# Altium PCB Analog_Board_pcb.PcbDoc
Units mil, origin at the board's own origin, x right, y up, seen from the top; angles counter-clockwise.
Board outline 1900 x 1960 mil, 2 copper layers (Top, Bottom), stack 61.811 mil thick; 37 components, 34 nets, 146 pads, 30 vias.
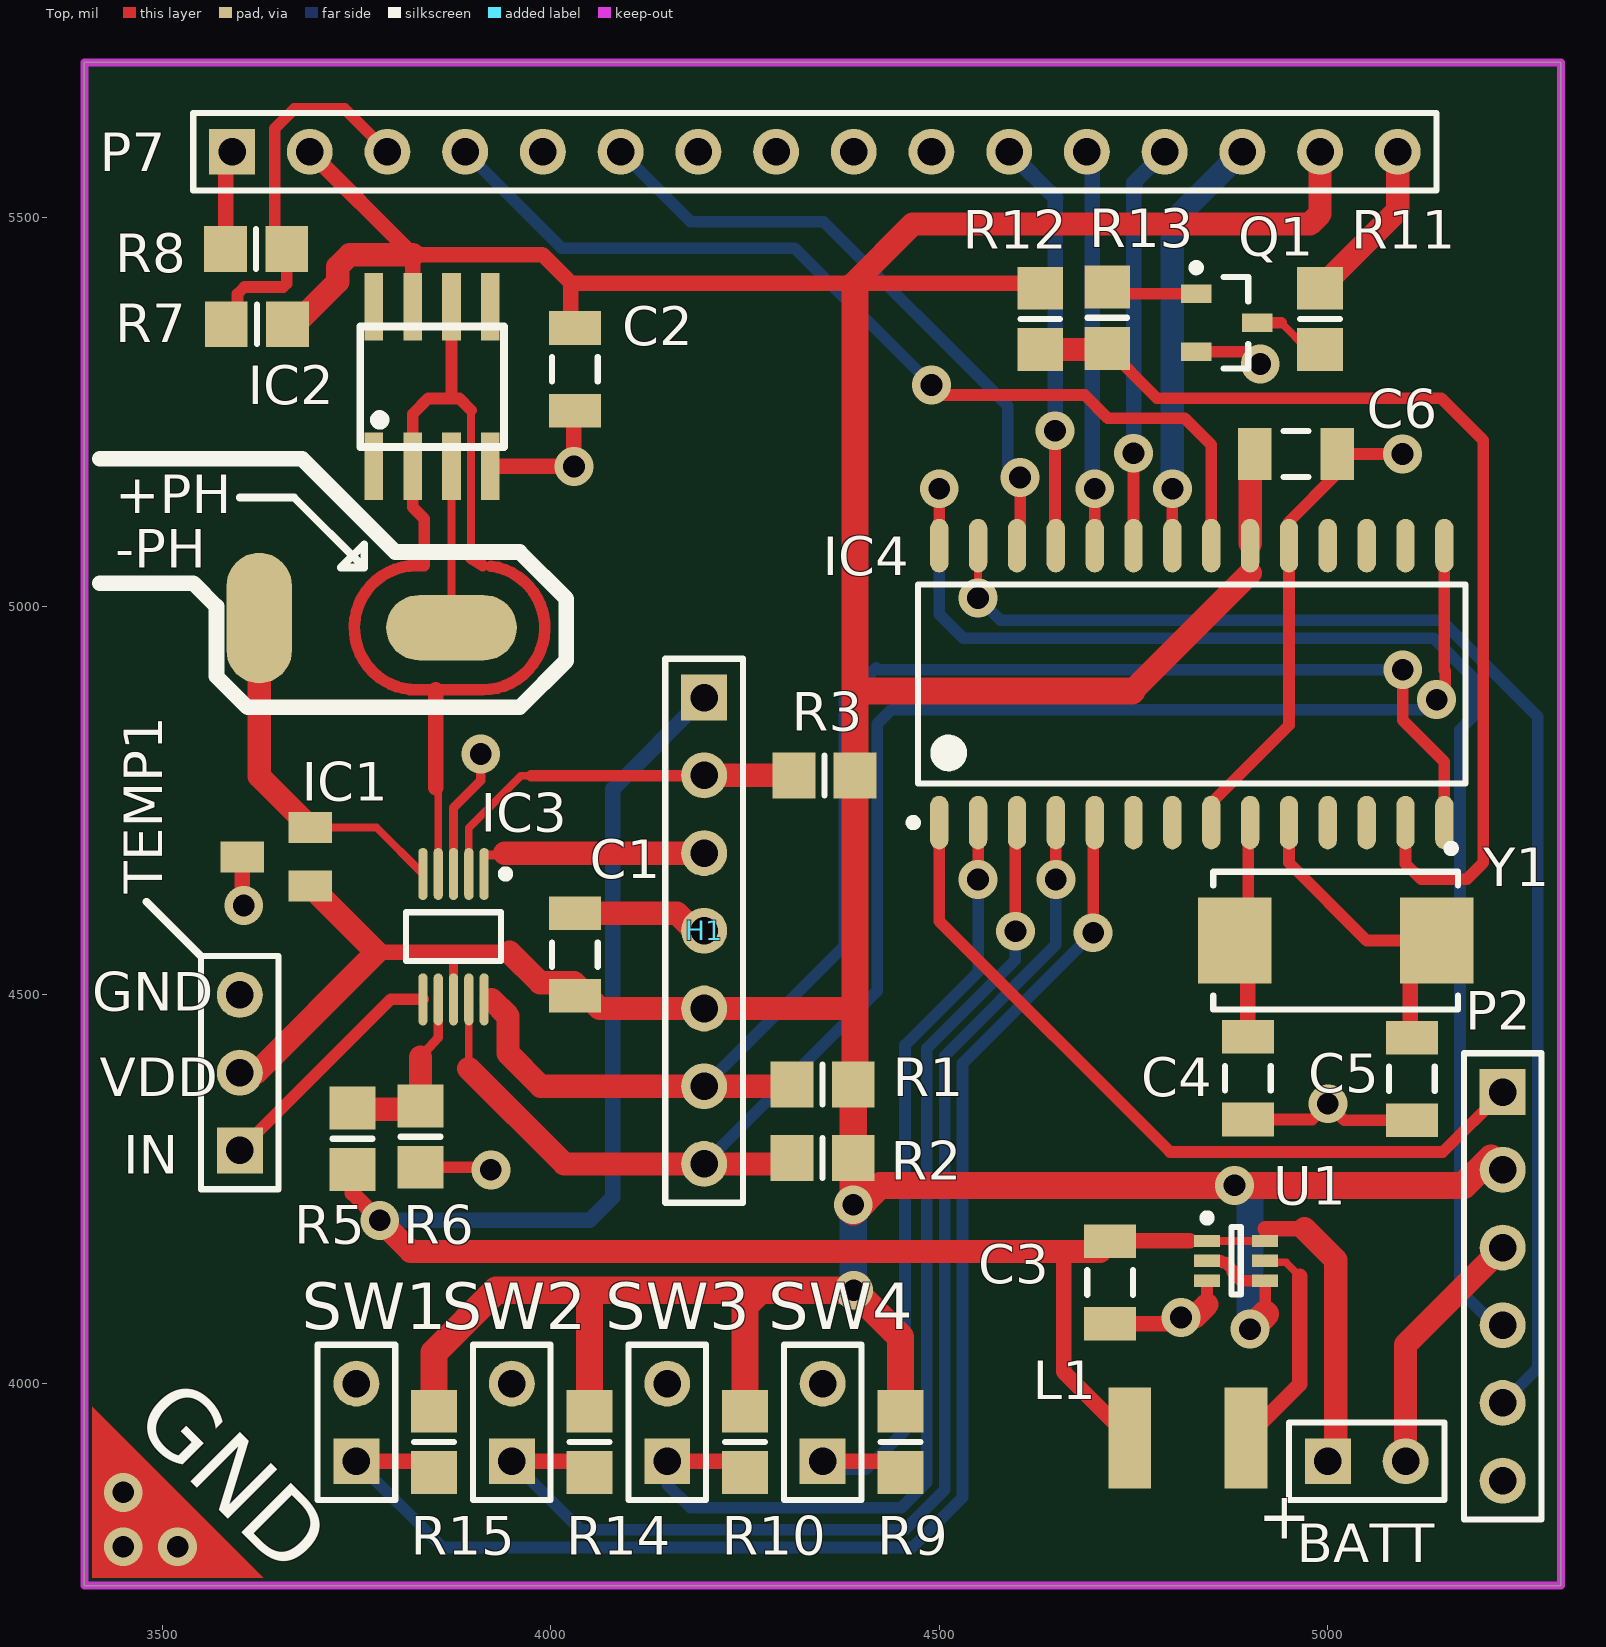
[diagram p0: Top view]
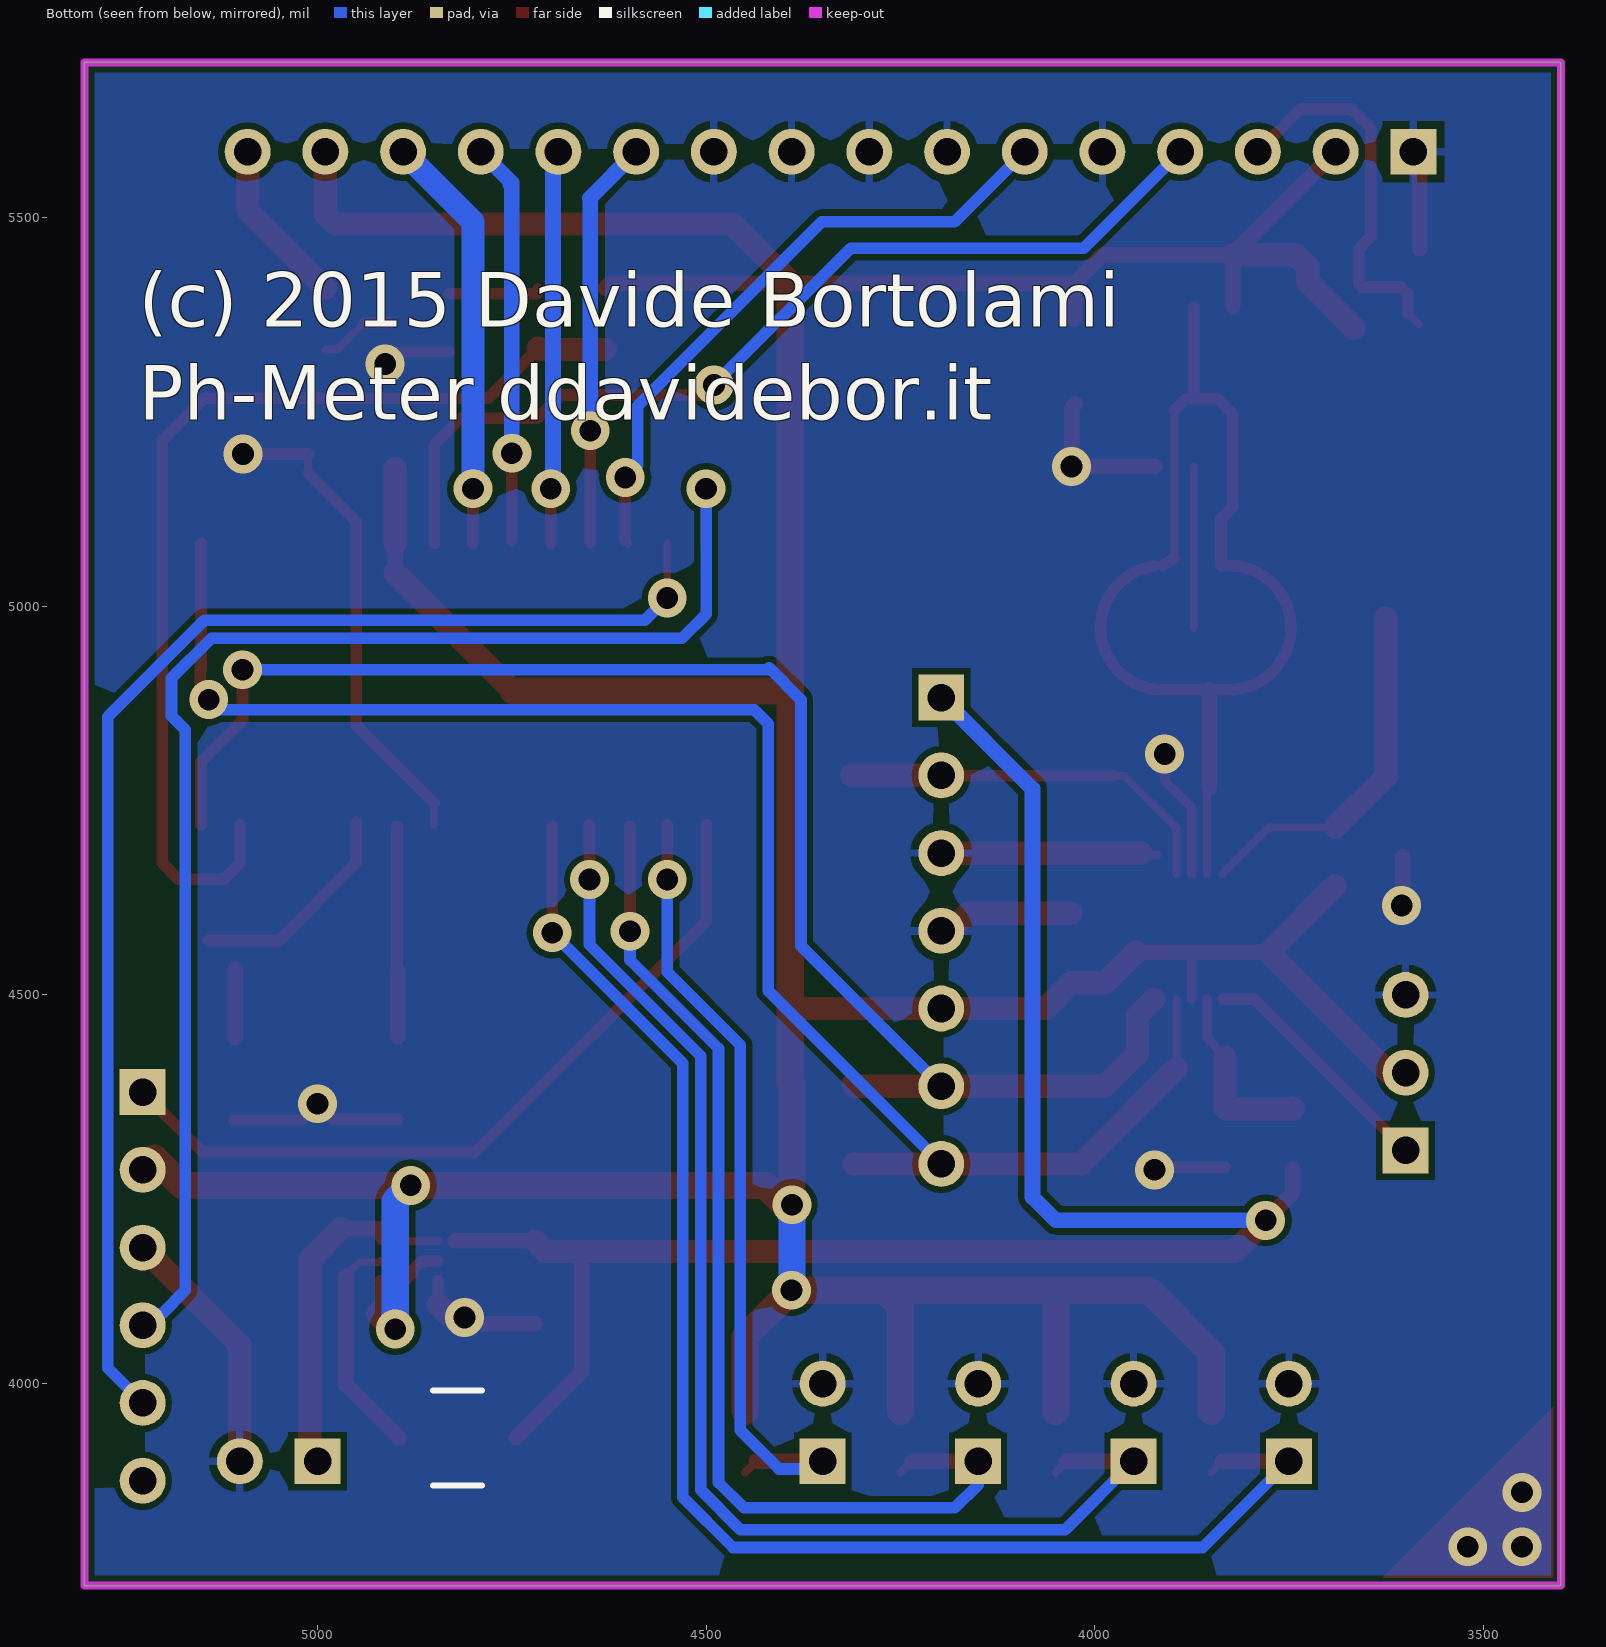
[diagram p1: Bottom view, seen from below]

## Layer stack, top to bottom
Top Solder: solder mask 0.4, Solder Resist, Dk 3.5
Top: signal copper 1.378
Dielectric 1: core 59.0551, FR-4, Dk 4.8
Bottom: signal copper 1.378
Bottom Solder: solder mask 0.4, Solder Resist, Dk 3.5

## Board outline
3400,3740 3400,5700 5300,5700 5300,3740

## Design rules (kind name [scope] priority, off if disabled: settings)
Clearance mdViaVia [IsVia vs IsVia] p1: gap=8
Clearance mdPadVia [IsPad vs IsVia] p2: gap=8
Clearance mdPadPad [IsPad vs IsPad] p3: gap=8
Clearance mdWireVia [(InLayerClass('Signal Layers') AND IsTrack) vs IsVia] p4: gap=8
Clearance mdWirePad [(InLayerClass('Signal Layers') AND IsTrack) vs IsPad] p5: gap=8
Clearance mdWireWire [(InLayerClass('Signal Layers') AND IsTrack) vs (InLayerClass('Signal Layers') AND IsTrack)] p6: gap=8
Clearance [All] p7: gap=8
HoleSize [All] p1: absolutevalues=TRUE maxlimit=100000 minlimit=12 maxpercent=80.000 minpercent=20.000
HoleToHoleClearance [All] p1: gap=8 allowstackedmicrovias=TRUE
PolygonConnect ThermalVias [IsVia] p1: connectstyle=Direct reliefconductorwidth=10 reliefentries=4 polygonreliefangle="90 Angle" airgapwidth=10
PolygonConnect [All] p2: connectstyle=Relief reliefconductorwidth=10 reliefentries=4 polygonreliefangle="90 Angle" airgapwidth=10
RoutingVias [All] p1: holewidth=28 width=50 viastyle="Through Hole" minholewidth=28 minwidth=50 maxholewidth=28 maxwidth=50
SilkToSilkClearance [All] p1 off: silktosilkclearance=8
SilkToSolderMaskClearance [IsPad] p1 off: minsilkscreentomaskgap=10 clearancetoexposedcopper=TRUE
SolderMaskExpansion [All] p1: expansion=3
Width [All] p1: maxlimit=100000 minlimit=6 preferedwidth=10 minimp=50.000000 maximp=50.000000 favimp=50.000000
26 further rules are at their usual default settings.

## Components (designator, comment, footprint, x,y, rotation, side; value= is the part's Value field where it differs from the comment)
BATT "Header 2" HDR1X2 5000,3900 r0 top (schematic designator P1)
C1 "" C1206 4031,4552 r270 top
C2 "" C1206 4031,5305 r90 top
C3 "" C1206 4720,4130 r90 top
C4 "" C1206 4897,4393 r270 top
C5 "" C1206 5108,4392 r270 top
C6 "Cap Semi" C1206 4959,5196 r180 top
H1 "Header 7" HDR1X7 4197.4,4882.6 r270 top
IC1 "MAX6101" SOT23 3647.4,4677.6 r90 top
IC2 "LMC6061" SO08 3847.4,5282.6 r0 top
IC3 "ADS1015IDGSR" TI-DGS10_N 3875,4575 r270 top
IC4 "PIC16F876-04/SO" MCHP-SOIC-SO28_L 4825,4900 r90 top
L1 "Inductor" INDC4532 4820,3930 r180 top
P2 "Header 6" HDR1X6 5225,4375 r270 top
P7 "Header 16" HDR1X16 3590,5585 r0 top
Q1 "BC846" SOT23_L 4870,5365 r0 top
R1 "10K" 6-0805_M 4350,4385 r180 top
R2 "10K" 6-0805_M 4350,4290 r180 top
R3 "10K" 6-0805_M 4352.4,4782.6 r180 top
R5 "10K" 6-0805_M 3745,4315 r90 top
R6 "1K" 6-0805_M 3832.4,4317.6 r270 top
R7 "Res3" 6-0805_M 3622,5363 r0 top
R8 "Res3" 6-0805_M 3621,5460 r0 top
R9 "Res3" 6-0805_M 4450,3925 r90 top
R10 "Res3" 6-0805_M 4250,3925 r90 top
R11 "Res3" 6-0805_M 4990,5370 r90 top
R12 "Res3" 6-0805_M 4630,5370 r90 top
R13 "Res3" 6-0805_M 4716.18,5371.42 r270 top
R14 "Res3" 6-0805_M 4050,3925 r90 top
R15 "Res3" 6-0805_M 3850,3925 r90 top
SW1 "Header 2" HDR1X2 3750,3900 r90 top (schematic designator P6)
SW2 "Header 2" HDR1X2 3950,3900 r90 top (schematic designator P5)
SW3 "Header 2" HDR1X2 4150,3900 r90 top (schematic designator P4)
SW4 "Header 2" HDR1X2 4350,3900 r90 top (schematic designator P3)
TEMP1 "Header 3" HDR1X3 3600,4300 r90 top
U1 "TPS61222DCKR" DCK6_N 4882,4158 r0 top
Y1 "16Mhz" CFPX-93 5010,4570 r180 top

## Footprints (in the part's own frame and the unit in brackets; to place one, negate y for a bottom-side part, rotate by r counter-clockwise, add the part's x,y. Pads: shape width x height; smd on the part's side, far side on the other; paste and mask are expansions set on the pad)
6-0805_M [mm] "Chip Resistor, Body 2.0x1.2mm, IPC Low Density"
  rect 1.4x1.5 smd: 1(-1,0) 2(1,0)
  silkscreen extent 0,-0.65 0,0.65, body extent -1.07,-0.7 1.07,0.7, height 0.7
C1206 [mm] "Chip Capacitor, Body 3.2x1.6mm, IPC High Density"
  rect 1.1x1.7 smd: 1(-1.35,0) 2(1.35,0)
  silkscreen extent -0.4,-0.75 0.4,0.75, body extent -1.7,-0.9 1.7,0.9, height 1.3
CFPX-93 [mm] "Surface Mount Quartz Crystal; Body 8.2 x 4.7 mm (LxW max)"
  rect 2.4x2.8 smd: 1(-3.3,0) 2(3.3,0)
  silkscreen extent -4,-3.14 4,2.25
DCK6_N [mm] "SOT23, 6-Leads, Body 2x1.3mm, Pitch 0.65mm, Lead Span 2.1mm, IPC Medium Density"
  rect 0.85x0.4 smd: 1(-0.95,0.65) 2(-0.95,0) 3(-0.95,-0.65) 4(0.95,-0.65) 5(0.95,0) 6(0.95,0.65)
  silkscreen extent -1.07,-1.1 0.15,1.52, body extent -0.7,-1.07 0.7,1.08, height 1.1
HDR1X2 [mm] "Connector; Header; 2 Position"
  rect 1.5x1.5 hole 0.9: 1(0,0)
  round 1.5 hole 0.9: 2(2.54,0)
  silkscreen extent -1.27,-1.27 3.81,1.27
HDR1X3 [mm] "Connector; Header; 3 Position"
  rect 1.5x1.5 hole 0.9: 1(0,0)
  round 1.5 hole 0.9: 2(2.54,0) 3(5.08,0)
  silkscreen extent -1.27,-1.27 6.35,1.27
HDR1X6 [mm] "Connector; Header; 6 Position"
  rect 1.5x1.5 hole 0.9: 1(0,0)
  round 1.5 hole 0.9: 2(2.54,0) 3(5.08,0) 4(7.62,0) 5(10.16,0) 6(12.7,0)
  silkscreen extent -1.27,-1.27 13.97,1.27
HDR1X7 [mm] "Connector; Header; 7 Position"
  rect 1.5x1.5 hole 0.9: 1(0,0)
  round 1.5 hole 0.9: 2(2.54,0) 3(5.08,0) 4(7.62,0) 5(10.16,0) 6(12.7,0) 7(15.24,0)
  silkscreen extent -1.27,-1.27 16.51,1.27
HDR1X16 [mm] "Connector; Header; 16 Position"
  rect 1.5x1.5 hole 0.9: 1(0,0)
  round 1.5 hole 0.9: 2(2.54,0) 3(5.08,0) 4(7.62,0) 5(10.16,0) 6(12.7,0) 7(15.24,0) 8(17.78,0) 9(20.32,0) 10(22.86,0) 11(25.4,0) 12(27.94,0) 13(30.48,0) 14(33.02,0) 15(35.56,0) 16(38.1,0)
  silkscreen extent -1.27,-1.27 39.37,1.27
INDC4532 [mm] "Chip Inductor, Body 4.5x3.2mm, IPC High Density"
  rect 1.4x3.3 smd: 1(1.9,0) 2(-1.9,0)
  body extent -2.4,-1.7 2.4,1.7, height 0.55
MCHP-SOIC-SO28_L [mm] "SOIC, 28-Leads, Body 17.9x7.5mm, Pitch 1.27mm, IPC High Density"
  oval 1.75x0.6 smd: 1(-4.525,8.255) 2(-4.525,6.985) 3(-4.525,5.715) 4(-4.525,4.445) 5(-4.525,3.175) 6(-4.525,1.905) 7(-4.525,0.635) 8(-4.525,-0.635) 9(-4.525,-1.905) 10(-4.525,-3.175) 11(-4.525,-4.445) 12(-4.525,-5.715) 13(-4.525,-6.985) 14(-4.525,-8.255) 15(4.525,-8.255) 16(4.525,-6.985) 17(4.525,-5.715) 18(4.525,-4.445) 19(4.525,-3.175) 20(4.525,-1.905) 21(4.525,-0.635) 22(4.525,0.635) 23(4.525,1.905) 24(4.525,3.175) 25(4.525,4.445) 26(4.525,5.715) 27(4.525,6.985) 28(4.525,8.255)
  silkscreen extent -4.65,-8.95 3.25,9.23, body extent -3.75,-8.95 3.75,8.95, height 2.65
SO08 [mil] "SO08"
  rect 24x87 smd: 1(-75,-102.36) 2(-25,-102.36) 3(25,-102.36) 4(75,-102.36) 5(75,103) 6(25,103) 7(-25,103) 8(-75,103)
SOT23 [mil] "SOT23"
  rect 40x56 smd: 1(-37.4,-43.31) 2(38,-43.31) 3(0,44)
SOT23_L [mm] "SOT23, 3-Leads, Body 2.9x1.3mm, Pitch 0.95mm, Lead Span 2.3mm, IPC High Density"
  rect 1x0.6 smd: 1(-1,0.95) 2(-1,-0.95) 3(1,0)
  silkscreen extent -1.12,-1.5 0.7,1.92, body extent -0.7,-1.5 0.7,1.5, height 1.1
TI-DGS10_N [mm] "SOP, 10-Leads, Body 3x3mm, Pitch 0.5mm, IPC Medium Density"
  oval 1.7x0.3 smd: 1(-2.05,1) 2(-2.05,0.5) 3(-2.05,0) 4(-2.05,-0.5) 5(-2.05,-1) 6(2.05,-1) 7(2.05,-0.5) 8(2.05,0) 9(2.05,0.5) 10(2.05,1)
  silkscreen extent -2.17,-1.55 0.8,1.83, body extent -1.55,-1.55 1.55,1.55, height 1.1

## Part data
BATT SW1 SW2 SW3 SW4: "Header, 2-Pin"
C1 C2 C3 C4 C5: library part "Cap Semi", "Capacitor (Semiconductor SIM Model)"
C6: "Capacitor (Semiconductor SIM Model)"
H1: "Header, 7-Pin"
IC1: library part MAX6520, "<b> 1.2V Voltage Reference</b> 50ppm/°C, SOT23, 3-Terminal<p> / Source: <a href=\"http://datasheets.maxim-ic.com/en/ds/MAX6520.pdf\"> Data sheet </a>"
IC2: library part 1AMP_P7+4D, "<b>OP AMP</b>"
IC3: "12-Bit ADC with Integrated Multiplexer, PGA, Comparator, Oscillator, and Reference, -40 to 125 degC, 10-pin SOP (DGS10), Green (RoHS & no Sb/Br)"
IC4: "8-Bit CMOS Flash Microcontroller, 4 MHz, 22 I/O, 0 to 70 degC, 28-pin SOIC (SO28), Tube"
P2: "Header, 6-Pin"
P7: "Header, 16-Pin"
Q1: "NPN General-purpose Transistor"
R1 R2 R3 R5 R6: library part RESISTOR0805, "<p><b>Resistors</b></p> / <b>0402</b> - 0402 Surface Mount Package / <ul> / <li>22 Ohm 1% 1/16W [Digikey: 311-22.0LRTR-ND]</li> / <li>33 Ohm 5% 1/16W</li> / <li>1.0K 5% 1/16W</li> / <li>1.5K 5% 1/16W</li> / <li>2.0K 1% 1/16W</li> / <li>10.0K 1% 1/16W [Digikey: 311-10.0KLRTR-ND]</li> / <li>10.0K 5% 1/16W [Digikey: RMCF0402JT10K0TR-ND]</li> / <li>12.1K 1% 1/16W [Digikey: 311-22.0LRTR-ND]</li> / <li>100.0K 5% 1/16W</li> / </ul> / <b>0603</b> - 0603 Surface Mount Package<br> / <ul> / <li>0 Ohm 1/10 Watt 1% Resistor</li> / <li>15 Ohm 1/10 Watt 1% Resistor</li> / <li>33 Ohm 1/10 Watt 1% Resistor</li> / <li>49.9 Ohm 1/10 Watt 1% Resistor</li> / <li>100 Ohm 1/10 Watt 1% Resistor</li> / <li>150 Ohm 1/10 Watt 1% Resistor</li> / <li>240 Ohm 1/10 Watt 1% Resistor</li> / <li>390 Ohm 1/10 Watt 1% Resistor</li> / <li>560 Ohm 1/10 Watt 1% Resistor</li> / <li>680 Ohm 1/10 Watt 1% Resistor</li> / <li>750 Ohm 1/10 Watt 1% Resistor</li> / <li>1.0K Ohm 1/10 Watt 1% Resistor</li> / <li>1.5K Ohm 1/10 Watt 1% Resistor</li> / <li>2.0K Ohm 1/10 Watt 1% Resistor</li> / <li>2.2K Ohm 1/10 Watt 1% Resistor</li> / <li>3.3K Ohm 1/10 Watt 1% Resistor</li> / <li>4.7K Ohm 1/10 Watt 1% Resistor</li> / <li>10.0K Ohm 1/10 Watt 1% Resistor</li> / <li>12.0K Ohm 1/10 Watt 1% Resistor</li> / <li>12.1K Ohm 1/10 Watt 1% Resistor</li> / <li>20.0K Ohm 1/10 Watt 1% Resistor</li> / <li>33.0K Ohm 1/10 Watt 1% Resistor</li> / <li>100.0K Ohm 1/10 Watt 1% Resistor</li> / </ul> / <b>0805</b> - 0805 Surface Mount Package / <ul> / <li>0 Ohm 1/8 Watt 1% Resistor</li> / <li>33 Ohm 1/8 Watt 1% Resistor</li> / <li>100 Ohm 1/8 Watt 1% Resistor</li> / <li>150 Ohm 1/8 Watt 1% Resistor</li> / <li>200 Ohm 1/8 Watt 1% Resistor</li> / <li>240 Ohm 1/8 Watt 1% Resistor</li> / <li>330 Ohm 1/8 Watt 1% Resistor</li> / <li>390 Ohm 1/8 Watt 1% Resistor</li> / <li>470 Ohm 1/8 Watt 1% Resistor</li> / <li>1.0K Ohm 1/8 Watt 1% Resistor</li> / <li>1.5K Ohm 1/8 Watt 1% Resistor</li> / <li>2.0K Ohm 1/8 Watt 1% Resistor</li> / <li>4.7K Ohm 1/8 Watt 1% Resistor</li> / <li>5.1K Ohm 1/8 Watt 1% Resistor</li> / <li>5.6K Ohm 1/8 Watt 1% Resistor</li> / <li>10.0K Ohm 1/8 Watt 1% Resistor</li> / <li>22.0K Ohm 1/8 Watt 1% Resistor</li> / <li>33.0K Ohm 1/8 Watt 1% Resistor</li> / <li>100K Ohm 1/8 Watt 1% Resistor</li> / </ul> / <b>1206</b> - 1206 Surface Mount Package<br/> / <br/> / <b>2012</b> - 2010 Surface Mount Package<br/> / <ul><li>0.11 Ohm 1/2 Watt 1% Resistor - Digikey: RHM.11UCT-ND</li></ul>"
R7 R8 R9 R10 R11 R12 R13 R14 R15: "Resistor"
TEMP1: "Header, 3-Pin"
U1: "Boost Voltage Converter with 0.7 to 5.5 V Input and 5 V Output, -40 to 85 degC, 6-Pin SC70 (DCK), Green (RoHS & no Sb/Br)"
Y1: library part 3SMXA, "Surface Mount Quartz Crystal"

## Free pads (board coordinates)
  oval 84x168 smd: 0(3625,4985)
  oval 168x84 smd: 1(3872.4,4972.6)

## Via types
v1: diameter 50, hole 28, Top to Bottom, 30 vias

## Nets (pads, with @x,y where several pads share a name; then routed paths per layer and width w, separated by ;. In a path a pad name is that pad's centre, name@x,y a point inside that pad or via, vN(x,y) a via of type N, cw(c..) or ccw(c..) an arc to the next point about the centre after c; other vN are vias at no path point)
AIN1: IC1.2 IC3.5 pad.0 | length 466.3
  Top w10: IC1.2 3775.74,4715.6 IC3.5
  Top w30: pad.0 3625,4781.31 IC1.2
AIN2: IC3.6 TEMP1.1 | length 316.1
  Top w15: TEMP1.1 3794.29,4494.29 IC3.6
AIN3: IC3.7 R5.2 R6.1 | length 237.8
  Top w12: 3832.4,4420 3855.32,4445 IC3.7
  Top w30: R5.2 3745,4353 3830.4,4353 3832.4,4355 R6.1 3832.4,4420
ALERT: H1.2 IC3.2 R3.2 | length 505.6
  Top w10: IC3.2 3894.69,4714.88 3961.8,4782 3975.12,4782
  Top w15: 3975.12,4782 4196.8,4782 H1.2
  Top w30: H1.2 R3.2
AUX: P2.6
GND: BATT.2 C1.1 C2.1 C3.1 C4.2 C5.2 C6.1 H1.3 H1.4 IC1.3 IC2.4 IC3.1 IC3.3 IC4.8 IC4.19 P2.3 P7.1 P7.5 P7.7 P7.8 P7.9 P7.10 Q1.2 R6.2 R8.1 SW1.2 SW2.2 SW3.2 SW4.2 TEMP1.3 U1.3 | length 2554.7
  Top w10: P7.1@3581.63,5576.63 P7.1 ; v1@3919.77,4278.23 v1(3923,4275) ; H1.4@4185,4582.6 H1.4 ; v1@4802.85,4076.85 v1(4811,4085) ; IC4.8@4850,4718.9 IC4.8@4850,4747.06 ; v1@4897.4,5327.6 v1(4913,5312) ; C6.1@5012.15,5171.15 C6.1 ; C5.2@5105.15,4336 C5.2
  Top w12: IC3.3 3875,4741 3910,4776 v1(3910,4810) ; IC3.1@3920,4680 3938.66,4680 3940.87,4682.21
  Top w15: R6.2 v1@3919.77,4278.23 ; Q1.2 v1@4897.4,5327.6 ; 4844.6,4101.6 U1.3 ; IC4.8@4850,4747.06 4950,4847.06 4950,5109 C6.1@5012.15,5171.15 ; C4.2 4979.85,4339.85 v1(5000,4360) 5021.15,4338.85 C5.2 ; C6.1 v1(5096,5196)
  Top w20: R8.1 P7.1@3581.63,5576.63 ; v1@3593.8,4607 v1(3605,4615) 3603.4,4616.6 IC1.3 ; IC2.4 4029.76,5180.24 4029.76,5255.87 C2.1@4025,5260.63 ; v1(4030,5180) v1@4038,5180 ; H1.4 H1.4@4206.8,4592 ; C3.1 v1@4802.85,4076.85
  Top w30: 3940.87,4682.21 4197.4,4682.21 H1.3 ; C1.1@4031,4605 4162.6,4605 H1.4@4185,4582.6 ; v1@4829,4086 4844.6,4101.6 ; BATT.2 5100,4050 P2.3
  other v1: 3450,3790 3520,3790 3450,3860
ICSPCLOCK: IC4.27 P2.5 | length 1755.4
  Top w10: v1(4550,5010.75) IC4.27@4550,5081.1
  Bottom w15: v1(4550,5010.75) 4578.75,4982 5145.99,4982 5270.03,4857.96 5270.03,4339.05 ; P2.5 5270.03,4020.03 5270.03,4093.65 ; 5270,4093.68 5270,4156.32 ; 5270,4193.68 5270,4256.32 ; 5270,4293.68 5270,4339.02 ; 5270.03,4156.35 5270.03,4193.65 ; 5270.03,4256.35 5270.03,4293.65
ICSPDAT: IC4.28 P2.4 | length 1822.6
  Top w15: IC4.28@4500,5081.1 v1(4500,5151.46)
  Bottom w15: v1(4500,5151.46) 4500,4990 4531,4959 5136.46,4959 5188,4907.46 5188,4859.26 5170,4841.26 5170,4120 5200,4090 5210,4090 P2.4
LCD-D4: IC4.25 P7.11 | length 529.6
  Top w10: IC4.25@4649,5082.1 IC4.25@4650,5081.1
  Top w15: IC4.25@4649,5082.1 v1(4649,5226)
  Bottom w20: P7.11 4650,5525 4649,5524 v1(4649,5226)
LCD-D5: IC4.24 P7.12 | length 509.8
  Top w15: IC4.24@4700,5081.1 v1(4700,5151.46)
  Bottom w20: P7.12@4697,5578 4697,5151.46 v1(4700,5151.46)
  Bottom w30: P7.12 P7.12@4697,5578
LCD-D6: IC4.23 P7.13 | length 523.8
  Top w10: IC4.23@4750,5081.1 4752,5083.1 IC4.23@4750,5085.1
  Top w15: IC4.23@4750,5085.1 v1(4750,5197)
  Bottom w20: v1(4750,5197) 4750,5541 4752,5543 4750,5545 P7.13
LCD-D7: IC4.22 P7.14 | length 541.2
  Top w15: IC4.22@4800,5081.1 v1(4800,5151.46)
  Bottom w30: v1(4800,5151.46) 4800,5495 P7.14
LCD-EN: IC4.26 P7.6 | length 824.6
  Top w10: IC4.26@4600,5081.1 IC4.26@4604,5085.1
  Top w15: IC4.26@4604,5085.1 v1(4604,5166)
  Bottom w10: P7.6@4090,5579 P7.6 ; v1@4588,5182 v1(4604,5166)
  Bottom w15: P7.6 4180,5495 4351,5495 4588,5258 v1@4588,5182
LCD-RS: IC4.21 P7.4 | length 1252.9
  Top w10: v1(4490,5285) 4490,5279 v1@4496,5272
  Top w15: v1@4496,5272 4687,5272 4717,5242 4816,5242 4850,5208 IC4.21@4850,5081.1
  Bottom w10: v1@4490,5279 v1(4490,5285)
  Bottom w15: P7.4 4014,5461 4314,5461 v1(4490,5285)
NetC4_1: C4.1 IC4.9 Y1.2 | length 274.4
  Top w10: Y1.2@4897,4531 4897.67,4531 Y1.2@4897.67,4533 ; IC4.9@4897.67,4716.57 IC4.9@4900,4718.9
  Top w15: Y1.2@4897.67,4533 IC4.9@4897.67,4716.57
  Top w20: C4.1 Y1.2@4897,4531
NetC5_1: C5.1 IC4.10 Y1.1 | length 371.4
  Top w10: Y1.1@5106,4533 Y1.1@5106.33,4533
  Top w15: IC4.10 4950,4670 5050,4570 Y1.1
  Top w20: C5.1@5106,4445.15 Y1.1@5106,4533
NetL1_2: L1.2 U1.5 | length 289.5
  Top w10: U1.5 4921.4,4156 4946,4156 4964,4138
  Top w20: L1.2 4964,3999.2 4964,4138
NetP7_3: P7.3 R7.1 R8.2 | length 498
  Top w10: R7.1 R7.1@3597,5377.37 ; 3656,5411 3660.37,5415.37
  Top w15: R7.1@3597,5377.37 3597,5402 3606,5411 3656,5411 ; 3660.37,5415.37 R8.2 3644.97,5475.4 3644.97,5614.97 3670,5640 3735,5640 P7.3
NetP7_16: P7.16 R11.2 | length 217.1
  Top w30: R11.2 5090,5509.37 P7.16
NetQ1_1: Q1.1 R13.1 | length 122.8
  Top w10: R13.1 4718,5410.79 R13.1@4718,5402.4
  Top w15: R13.1@4718,5402.4 Q1.1
NetQ1_3: Q1.3 R11.1 | length 94.9
  Top w10: 4940,5365 4974.37,5330.63 R11.1
  Top w15: Q1.3 4940,5365
PHIN: IC2.3 pad.1 | length 207.6
  Top w10: pad.1 IC2.3
PWM1: IC4.13 R12.1 R13.2 | length 1330.4
  Top w15: R13.2 4780.23,5268 5146,5268 5200,5214 5200,4670 5179,4649 5120,4649 5100,4669 IC4.13@5100,4718.9
  Top w30: R12.1 4714.76,5330.63 R13.2
PWM2: IC4.12
SCL: H1.6 IC3.10 IC4.14 R1.2 | length 1993.3
  Top w15: v1(5096.48,4918.5) 5096.48,4853.52 5150,4800 IC4.14@5150,4718.9
  Top w30: 3923.59,4494.29 3945,4472.88 3945,4425 3987.4,4382.6 H1.6 4309.4,4382.6 R1.2
  Bottom w10: 4419,4921 4421.5,4918.5
  Bottom w15: H1.6 4378,4563.2 4378,4880 4419,4921 ; 4421.5,4918.5 v1(5096.48,4918.5)
SDA: H1.7 IC3.9 IC4.15 R2.2 | length 2174.8
  Top w10: 3894.69,4405.31 IC3.9 ; R2.2@4309.4,4282.6 4313.72,4278.28 R2.2@4313.03,4277.6 ; v1@5149,4867 v1@5151,4869 ; 5150,4918 5151,4917
  Top w15: 5150,4918 IC4.15@5150,5081.1 ; v1@5151,4869 5151,4917
  Top w30: 3894.69,4405.31 4017.4,4282.6 H1.7 R2.2@4309.4,4282.6
  Bottom w10: v1@5149,4867 v1@5151,4869
  Bottom w15: H1.7 4420,4505.2 4420,4849 4438,4867 v1@5149,4867
  other v1: 5140,4880
SWITCH-1: IC4.2 R9.1 SW4.1 | length 1054.7
  Top w10: R9.1@4435.63,3900 R9.1
  Top w15: v1(4550,4648.54) IC4.2@4550,4718.9
  Top w20: SW4.1 R9.1@4435.63,3900
  Bottom w15: SW4.1 4360,3890 4406.13,3890 4456,3939.87 4456,4435.58 4550,4529.58 v1(4550,4648.54)
SWITCH-2: IC4.3 R10.1 SW3.1 | length 1390.2
  Top w10: R10.1@4235.63,3900 R10.1 ; IC4.3@4598,4716.9 IC4.3@4600,4718.9
  Top w15: v1(4598,4582) IC4.3@4598,4716.9
  Top w20: SW3.1 R10.1@4235.63,3900
  Bottom w15: SW3.1 4150,3870 4180,3840 4451.31,3840 4484,3872.69 4484,4431.05 4598,4545.05 v1(4598,4582)
SWITCH-3: IC4.4 R14.1 SW2.1 | length 1635.6
  Top w10: R14.1@4035.63,3900 R14.1
  Top w15: v1(4650,4648.54) IC4.4@4650,4718.9
  Top w20: SW2.1 R14.1@4035.63,3900
  Bottom w15: SW2.1 4038,3812 4455.84,3812 4507,3863.16 4507,4421.53 4650,4564.53 v1(4650,4648.54)
SWITCH-4: IC4.5 R15.1 SW1.1 | length 1894.4
  Top w10: R15.1@3835.63,3900 R15.1 ; IC4.5@4698,4716.9 IC4.5@4700,4718.9
  Top w15: v1(4698,4580) IC4.5@4698,4716.9
  Top w20: SW1.1 R15.1@3835.63,3900
  Bottom w15: SW1.1 3861,3789 4465.37,3789 4530,3853.63 4530,4412 v1(4698,4580)
V-OUT: IC2.2 IC2.6 IC3.4 | length 1918.5
  Top w10: 3827.4,4892.6 cw(c3827.4,4972.6) 3772,4914.89 cw(c3827.4,4972.6) 3827.4,5052.6 ; 3852.4,4766.91 3855.32,4764 IC3.4 ; 3870,5267.6 3872.4,5270 ; 3897.4,5061.74 3897.4,5252.6 ; 3912.44,4892.64 ccw(c3912.44,4972.64) 3992.4,4970.12 ; 3958.33,5038.1 cw(c3912.4,4972.6) 3977.9,5018.53 cw(c3912.4,4972.6) 3992.36,4970.08 ; 3912.4,5052.6 cw(c3912.4,4972.6) 3923.21,5051.86 ccw(c3912.4,4972.6) 3912.4,5052.6
  Top w15: 3872.4,5270 IC2.6 ; 3897.4,5061.74 3912.4,5052.6 ; 3897.4,5252.6 3882.4,5267.6 3870,5267.6 3842.4,5267.6 3822.4,5247.6 IC2.2 3822.4,5127.6 3837.4,5112.6 3837.4,5052.6 3827.4,5052.6 ccw(c3827.4,4972.6) 3772,4914.89 ccw(c3827.4,4972.6) 3827.4,4892.6 3852.4,4892.6 3912.44,4892.6 ; 3912.44,4892.64 ccw(c3912.44,4972.64) 3992.4,4970.12 ; 3923.22,5051.86 cw(c3912.4,4972.6) 3958.33,5038.1 cw(c3912.4,4972.6) 3977.9,5018.53 cw(c3912.4,4972.6) 3992.36,4970.08
  Top w20: 3852.4,4766.91 3852.4,4892.6
VBAT: BATT.1 C3.2 H1.1 L1.1 R5.1 U1.1 U1.6 | length 2885.7
  Top w10: U1.1@4844.6,4183.87 U1.1 U1.6
  Top w15: U1.6@4919.4,4188.87 4919.4,4199
  Top w20: R5.1 3745,4245 v1(3780,4210) ; 4660,4170 4660,4015.2 L1.1 ; C3.2@4706.85,4170 C3.2@4713.85,4177 ; C3.2 4720,4183.87 4822.47,4183.87 ; 4919.4,4199 4970,4199
  Top w30: v1(3780,4210) 3820,4170 4660,4170 C3.2@4706.85,4170 ; C3.2@4713.85,4177 C3.2 ; 4970,4199 5010,4159 BATT.1@5010,3890
  Bottom w20: v1(3780,4210) 4050,4210 4080,4240 4080,4765.2 H1.1
VDD: C1.2 C2.2 C6.2 H1.5 IC1.1 IC2.7 IC3.8 IC4.20 P2.2 P7.2 P7.15 R1.1 R2.1 R3.1 R7.2 R9.2 R10.2 R12.2 R14.2 R15.2 TEMP1.2 U1.2 U1.4 | length 7491.2
  Top w10: TEMP1.2 TEMP1.2@3620.91,4400
  Top w12: IC3.8 3875,4555
  Top w15: U1.2 4862.41,4158 4864.63,4155.78 4867.75,4155.78 4876.83,4146.7 4876.83,4143.58 4888,4132.41 U1.4 ; 4919.4,4089.4 U1.4@4919.4,4124.63
  Top w20: P7.2 3822.4,5452.6 ; 3775.91,4555 3875,4555 3947,4555 ; IC2.7 3822.4,5452.6 ; C2.2@4026,5370 4026,5416 ; R1.1 R1.1@4391.77,4387.4 ; R12.2 4623.37,5416 4390,5416 4026,5416 ; 4900,5042.94 IC4.20@4900,5081.1 ; 3822.4,5452.6 3989.4,5452.6 4026,5416
  Top w30: TEMP1.2@3620.91,4400 3775.91,4555 IC1.1 ; R7.2@3666.37,5358 3726,5417.63 3726,5437 3741.6,5452.6 3822.4,5452.6 ; 3947,4555 3986.37,4515.63 4030,4515.63 4063.03,4482.6 H1.5 4387.37,4482.6 ; 4391.77,5414.23 4390,5416 4466,5492 4977,5492 4990,5505 P7.15 ; 4748.06,4891 4900,5042.94 ; IC4.20@4900,5081.1 C6.2@4900,5177
  Top w35: R15.2 3850,4040 3930,4120 4060,4120 ; R14.2 4050,4110 4060,4120 ; R10.2 4250,4100 4270,4120 ; R1.1 R2.1 v1(4389.37,4230) 4389.37,4220.63 4423.77,4255.03 v1(4880,4255.03) 5175.03,4255.03 5210,4290 P2.2 ; R1.1@4391.77,4387.4 R3.1 4391.77,4891 ; 4391.77,5414.23 4391.77,4891 ; R9.2 4450,4060 v1(4390,4120) 4270,4120 ; 4748.06,4891 4391.77,4891 ; v1(4900,4070) 4919.4,4089.4 ; 4060,4120 4270,4120
  Bottom w35: v1(4389.37,4230) 4389.37,4120.63 v1(4390,4120) ; v1(4880,4255.03) 4900,4235.03 v1(4900,4070)
VPP: IC4.1 P2.1 | length 1003.8
  Top w15: IC4.1@4500,4718.9 4500,4595 4797,4298 5148,4298 P2.1
pads on no net: IC2.1 IC2.5 IC2.8 IC4.6 IC4.7 IC4.11 IC4.16 IC4.17 IC4.18

## Polygon pours and split planes (outlines as drawn)
GND on Bottom "gnd" (solid, remove dead copper, pour order 4): 3400,3730 3410,3740 5300,3740 5300,5700 3400,5700 3400,3740

## Keep-outs
Keep-Out Layer:
  the board outline again, w10

## Other copper
Top:
  region net GND: 3410,3750 3630,3750 3410,3970

## Silkscreen, mask and mechanical layers (free items; w line width, h text height)
Top Overlay:
  circle w13: c3780,5240 r6
  lines w10: 3480,4620 3550,4550 ; 3600,5140 3670,5140 3760,5050 ; 3760,5050 3730,5050 3760,5080 3760,5050 ; 3755,5205 3940,5205 3940,5360 3873.75,5360 3821.25,5360 3755,5360 3755,5205
  lines w20: 3420,5030 3540,5030 3570,5000 3570,4910 3610,4870 3960,4870 4020,4930 4020,5010 3960,5070 3800,5070 3680,5190 3420,5190
  text "+PH" at 3440,5120 h50
  text "-PH" at 3440,5050 h50
  text "GND" at 3410,4480 h50
  text "VDD" at 3420,4370 h50
  text "IN" at 3450,4270 h50
  text "GND" at 3460,3950 h90 r315
  text "+" at 4910,3800 h60
Bottom Overlay:
  text "(c) 2015 Davide Bortolami" at 5230,5360 h70
  text "Ph-Meter ddavidebor.it" at 5230,5240 h70
Top Solder:
  rectangle: 3825,4880 3905,4900
  rectangle: 3825,5120 3840,5135
  rectangle: 3840,5255 3885,5265
  rectangle: 3825,5225 3845,5255
  rectangle: 3835,5040 3900,5260
  region: 3885,4890 3882.4,4892.6 3792.4,4892.6 3745,4940 3745,4980 3760,4995 3760,5010 3800,5050 3850,5050 3855,5055 3940,5055 3990,5005 3990,4960 3975,4945 3975,4920 3960,4920 3932.6,4892.6 3912.4,4892.6
Bottom Solder:
  region: 3410,3750 3630,3750 3410,3970
Unrouted:
  lines w0: 1397.6,3002.6 1437.6,3140.6 1735.6,3422.6 ; 1397.6,3367.6 1530.6,3372.6 ; 1420.6,3587.6 1627.6,3640.6 1787.6,3610.6 ; 1437.6,3215.6 1567.6,3210.6 ; 1495.6,3587.6 1597.6,3002.6 2097.6,3274.6 ; 1497.6,3002.6 1567.6,3210.6 ; 1530.6,3322.6 1567.6,3210.6 ; 1530.6,3422.6 1735.6,3372.6 2038.6,3441.6 ; 1567.6,3135.6 1712.6,3140.6 2038.6,3274.6 ; 1627.6,3565.6 2077.6,3274.6 1697.6,3002.6 ; 1712.6,3215.6 1997.6,3002.6 ; 1787.6,3535.6 2077.6,3441.6 1897.6,3002.6 ; 1797.6,3002.6 2097.6,3441.6 1922.6,3610.6 ; 1922.6,3535.6 2087.6,3535.6 2057.6,3441.6 1942.6,3256.6 1567.6,3210.6 ; 2018.6,3274.6 2277.6,3292.6 ; 2018.6,3441.6 1980.6,3169.6 2137.6,3167.6 ; 2057.6,3274.6 1905.6,3169.6 1735.6,3422.6 ; 2087.6,3610.6 1787.6,3610.6 ; 1735.6,3422.6 1787.6,3610.6